# EAGLE board Dual Power Supply design board (EAGLE 9.6.2)
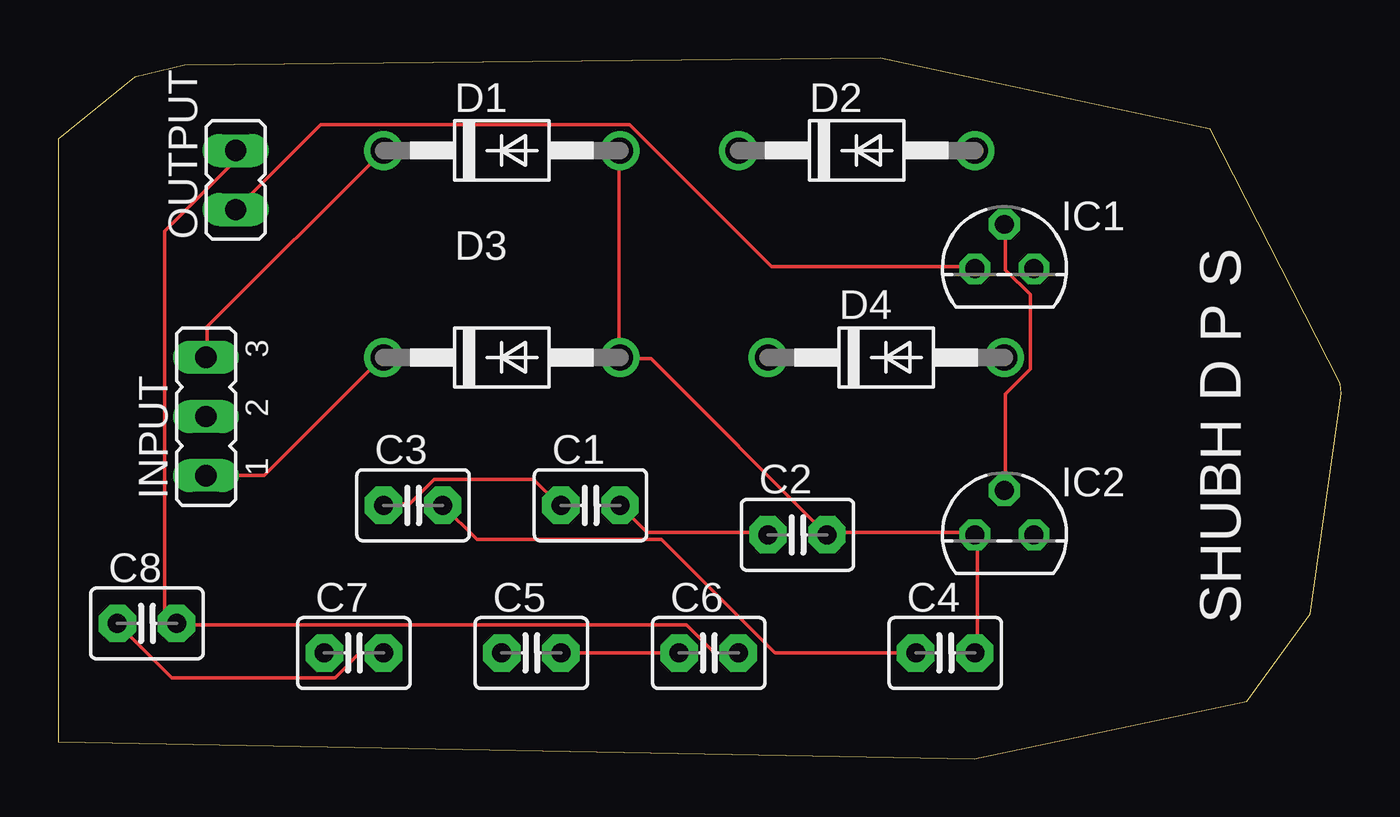
[diagram p0: board, top side]
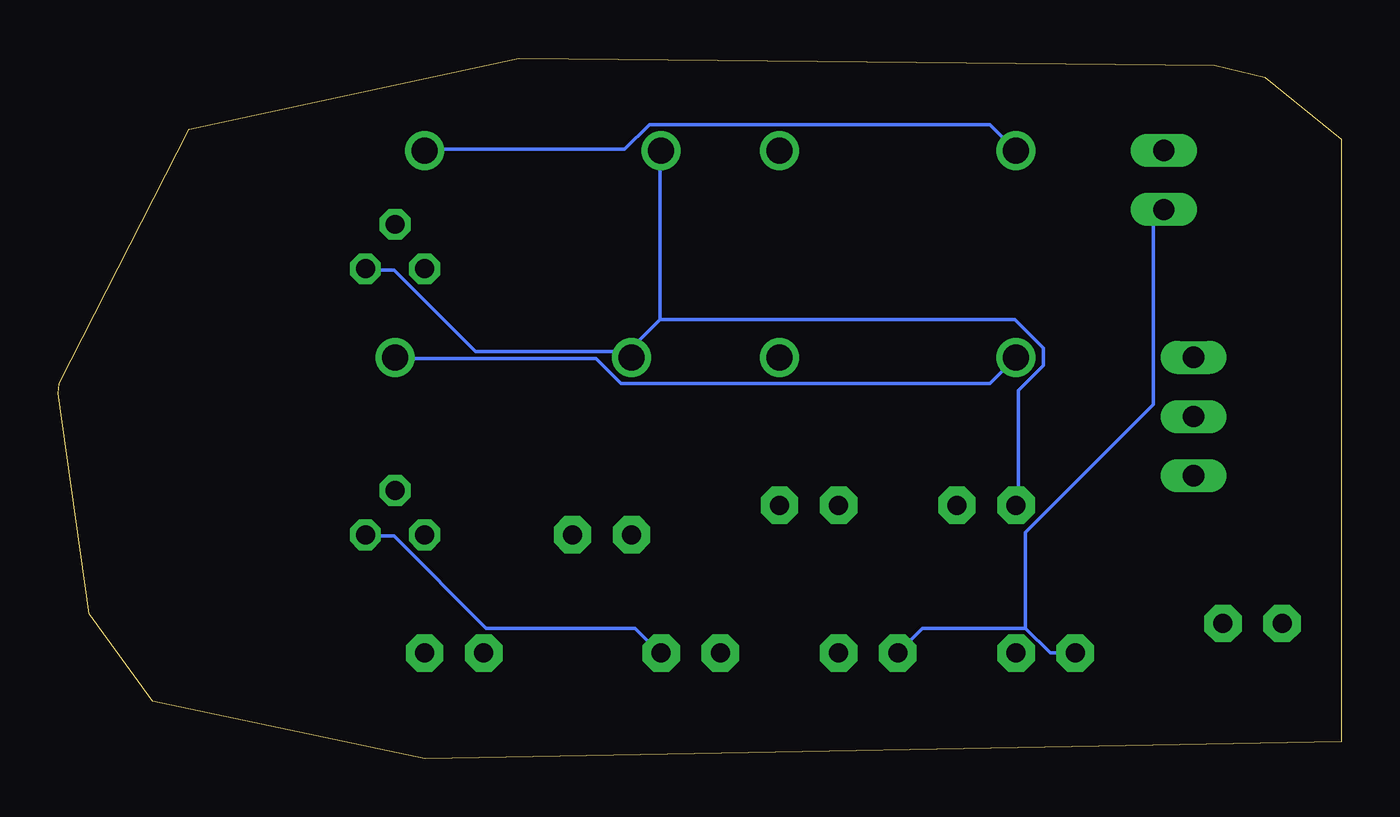
[diagram p1: board, bottom side, seen from below]

Size 55.11 x 30.1 mm. Coordinates in mm from the lower left corner, seen from the top.
Outline: 0,0.73 39.34,0 51.06,2.46 53.77,6.22 55.11,15.68 55.06,16.12 49.48,27.04 35.31,30.1 5.44,29.79 3.29,29.28 0,26.62 0,0.73
Copper layers (1*16): Top 0.035mm / dielectric 1.5mm / Bottom 0.035mm
Design rules "default": minimum track width 6mil, minimum drill 0.35mm, track to track 6mil, track to pad 6mil, pad to pad 6mil, via to via 6mil, smd to smd 6mil, copper to edge 40mil, drill to drill 6mil, minimum pad ring 10mil, minimum via ring 8mil, stop-mask expansion 4mil, vias tented up to drill 0mil, thermal gap 10mil

## Footprints (pad centres in the part's own frame; a part is rotated, then mirrored left to right if it is on the bottom)
C2.5-3 = drill 0.813 pad 1.6 octagon: 1 -1.27,0; 2 1.27,0
DO41-10 = drill 1.118: A 5.08,0; C -5.08,0
TO92 = drill 0.813 octagon: 1 -1.27,0; 2 0,1.905; 3 1.27,0
JP2 = drill 0.914 long: 1 -2.54,0; 2 0,0; 3 2.54,0
JP1 = drill 0.914 long: 1 0,-1.27; 2 0,1.27

## Placement (x,y rotation side)
C1  2200uf  [C2.5-3]  22.86,10.89 0 top
C2  2200uf  [C2.5-3]  31.75,9.62 0 top
C3  10uf  [C2.5-3]  15.24,10.89 0 top
C4  10uf  [C2.5-3]  38.1,4.54 0 top
C5  10uf  [C2.5-3]  20.32,4.54 0 top
C6  10uf  [C2.5-3]  27.94,4.54 0 top
C7  10uf  [C2.5-3]  12.7,4.54 0 top
C8  10uf  [C2.5-3]  3.81,5.81 0 top
D1  1N4004  [DO41-10]  19.05,26.13 0 top
D2  1N4004  [DO41-10]  34.29,26.13 0 top
D3  1N4004  [DO41-10]  19.05,17.24 0 top
D4  1N4004  [DO41-10]  35.56,17.24 0 top
IC1  7805L  [TO92]  40.64,21.05 0 top
IC2  7805L  [TO92]  40.64,9.62 0 top
INPUT  12V  [JP2]  6.35,14.7 90 top
OUTPUT  5V  [JP1]  7.62,24.86 0 top

## Library data of the parts
C1-C8 = capacitor-wima
D1-D4 = diode
IC1 IC2 = linear
INPUT OUTPUT = jumper

## Nets
GND: INPUT.2
N$1: C1.2 C2.1
N$2: D1.C D2.A INPUT.3
N$3: C1.1 C3.1 D2.C D4.C IC1.3
N$4: C2.2 C4.2 D1.A D3.A IC2.1
N$5: D3.C D4.A INPUT.1
N$6: C3.2 C4.1
N$7: C5.1 C7.1 IC1.1 OUTPUT.1
N$9: C6.2 C8.2 IC2.3 OUTPUT.2
N$10: IC1.2 IC2.2
N$11: C7.2 C8.1
N$12: C5.2 C6.1

## Tracks (layer width: path | path; a pad name or v marks a point on that pad's centre or on a via)
N$1
  Top 0.152: C1.2 25.3,9.72 30.48,9.72 C2.1
N$2
  Top 0.152: D1.C 6.4,18.56 6.4,17.34 INPUT.3
  Bottom 0.152: D1.C 15.09,27.25 29.72,27.25 30.79,26.18 39.32,26.18 D2.A
N$3
  Top 0.152: C3.1 14.02,10.94 15.09,10.94 16.15,12.01 20.42,12.01 21.49,10.94 C1.1
  Bottom 0.152: 30.63,17.5 37.19,17.5 40.69,21 41.91,21 IC1.3 | 30.63,17.5 30.48,17.34 D4.C 30.63,17.5 | 29.26,18.87 29.26,26.03 D2.C | 30.63,17.5 29.26,18.87 | 29.26,18.87 14.02,18.87 12.8,17.65 12.8,16.89 13.87,15.82 13.87,10.94 C3.1
N$4
  Top 0.152: D1.A 24.08,26.03 24.08,17.34 D3.A 24.23,17.19 25.45,17.19 C2.2 33.07,9.72 39.32,9.72 IC2.1 39.47,9.57 39.47,4.54 C4.2
N$5
  Top 0.152: INPUT.1 8.84,12.16 13.87,17.19 D3.C
  Bottom 0.152: D3.C 15.09,16.12 30.94,16.12 32,17.19 40.54,17.19 D4.A
N$6
  Top 0.152: C4.1 30.79,4.54 25.91,9.42 17.98,9.42 C3.2
N$7
  Top 0.152: OUTPUT.1 11.28,27.25 24.54,27.25 30.63,21.15 39.32,21.15 IC1.1
  Bottom 0.152: C7.1 12.5,4.54 13.56,5.61 | 13.56,5.61 17.98,5.61 C5.1 | 13.56,5.61 13.56,9.72 8.08,15.21 8.08,23.14 OUTPUT.1
N$9
  Top 0.152: OUTPUT.2 7.62,25.73 4.57,22.68 4.57,6.37 5.03,5.91 C8.2 5.18,5.76 26.98,5.76 28.19,4.54 C6.2
  Bottom 0.152: IC2.3 41.91,9.57 40.69,9.57 36.73,5.61 30.33,5.61 29.26,4.54 C6.2
N$10
  Top 0.152: IC2.2 40.69,11.55 40.69,15.67 41.76,16.73 41.76,19.93 40.69,21 40.69,22.83 IC1.2
N$11
  Top 0.152: C7.2 12.95,4.54 11.89,3.48 4.88,3.48 C8.1
N$12
  Top 0.152: C6.1 C5.2

## Text on the board
tNames: SHUBH D P S